# Altium PCB pcb.PCBDOC
Units mm, origin at the board's own origin, x right, y up, seen from the top; angles counter-clockwise.
Board outline 39 x 33 mm, 2 copper layers (TopLayer, BottomLayer), stack 1.671 mm thick; 11 components, 13 nets, 55 pads, 2 vias.
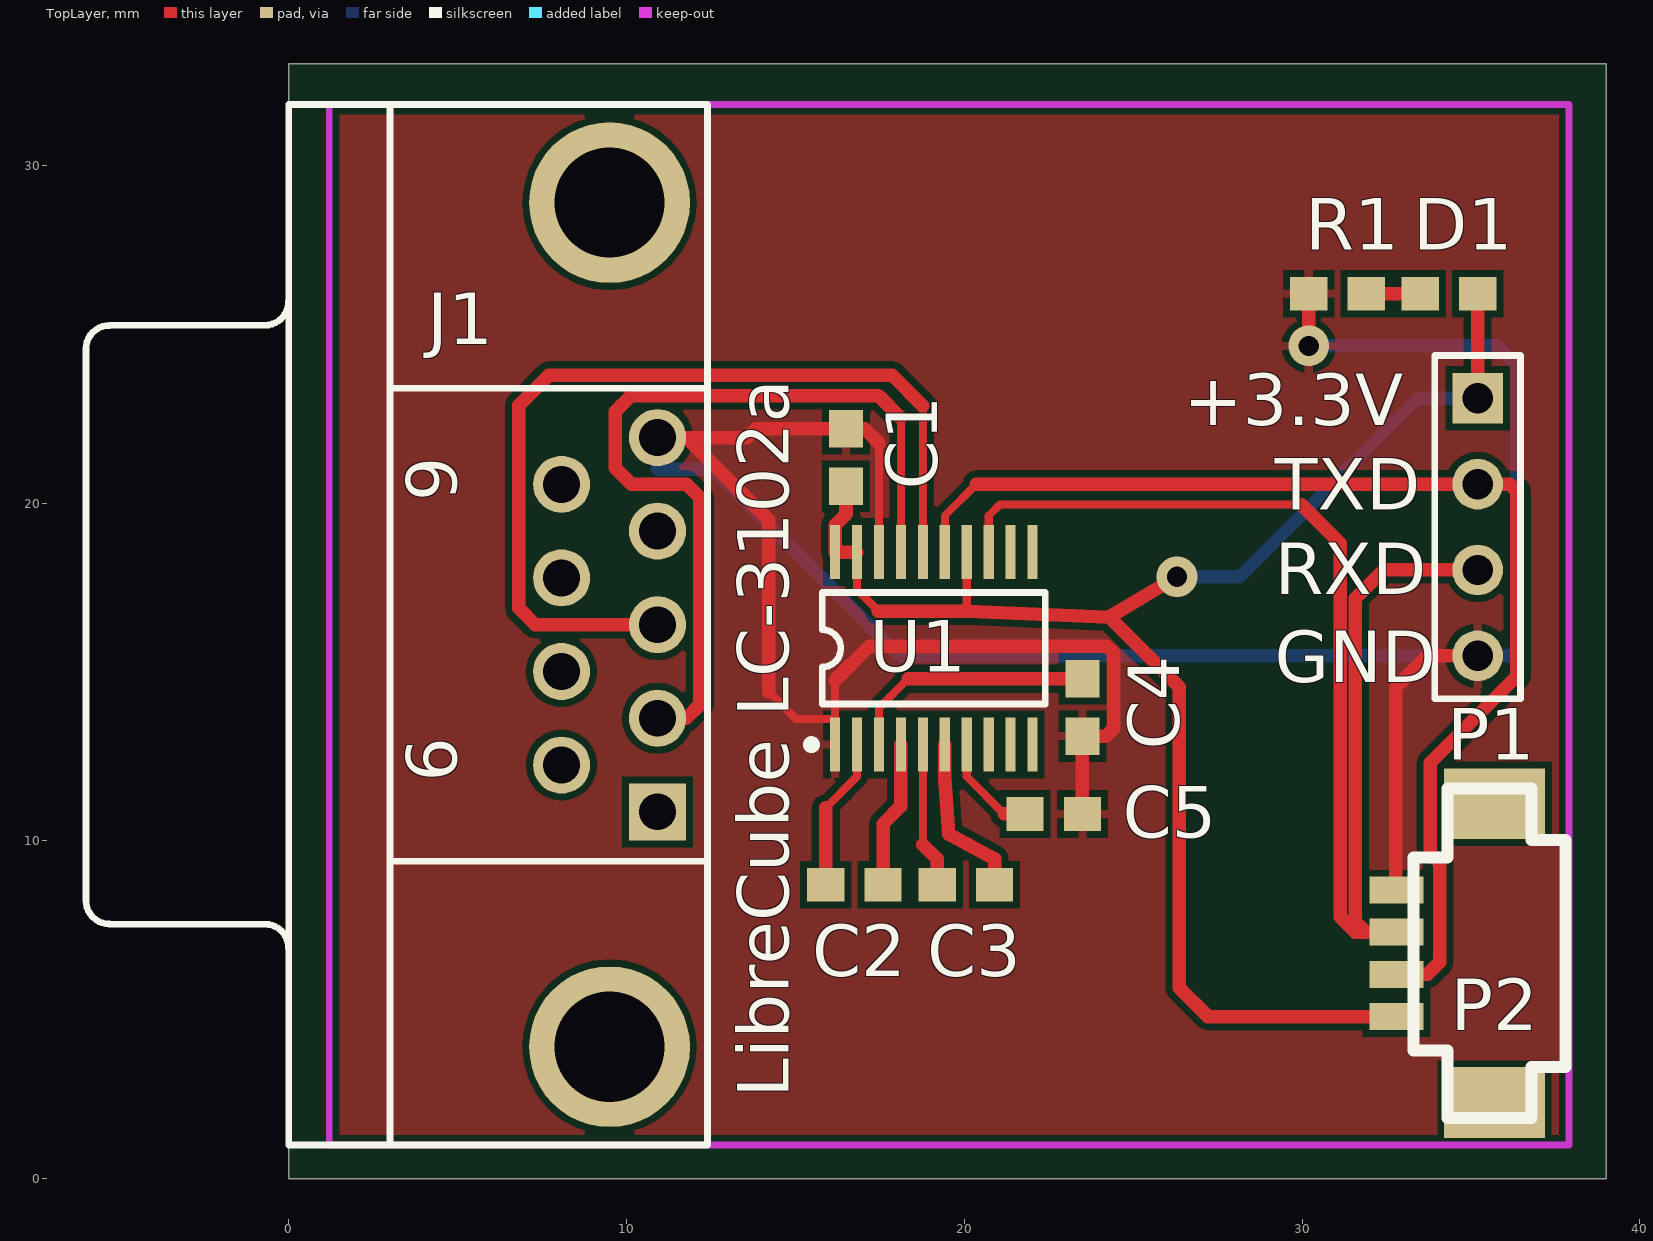
[diagram p0: TopLayer view]
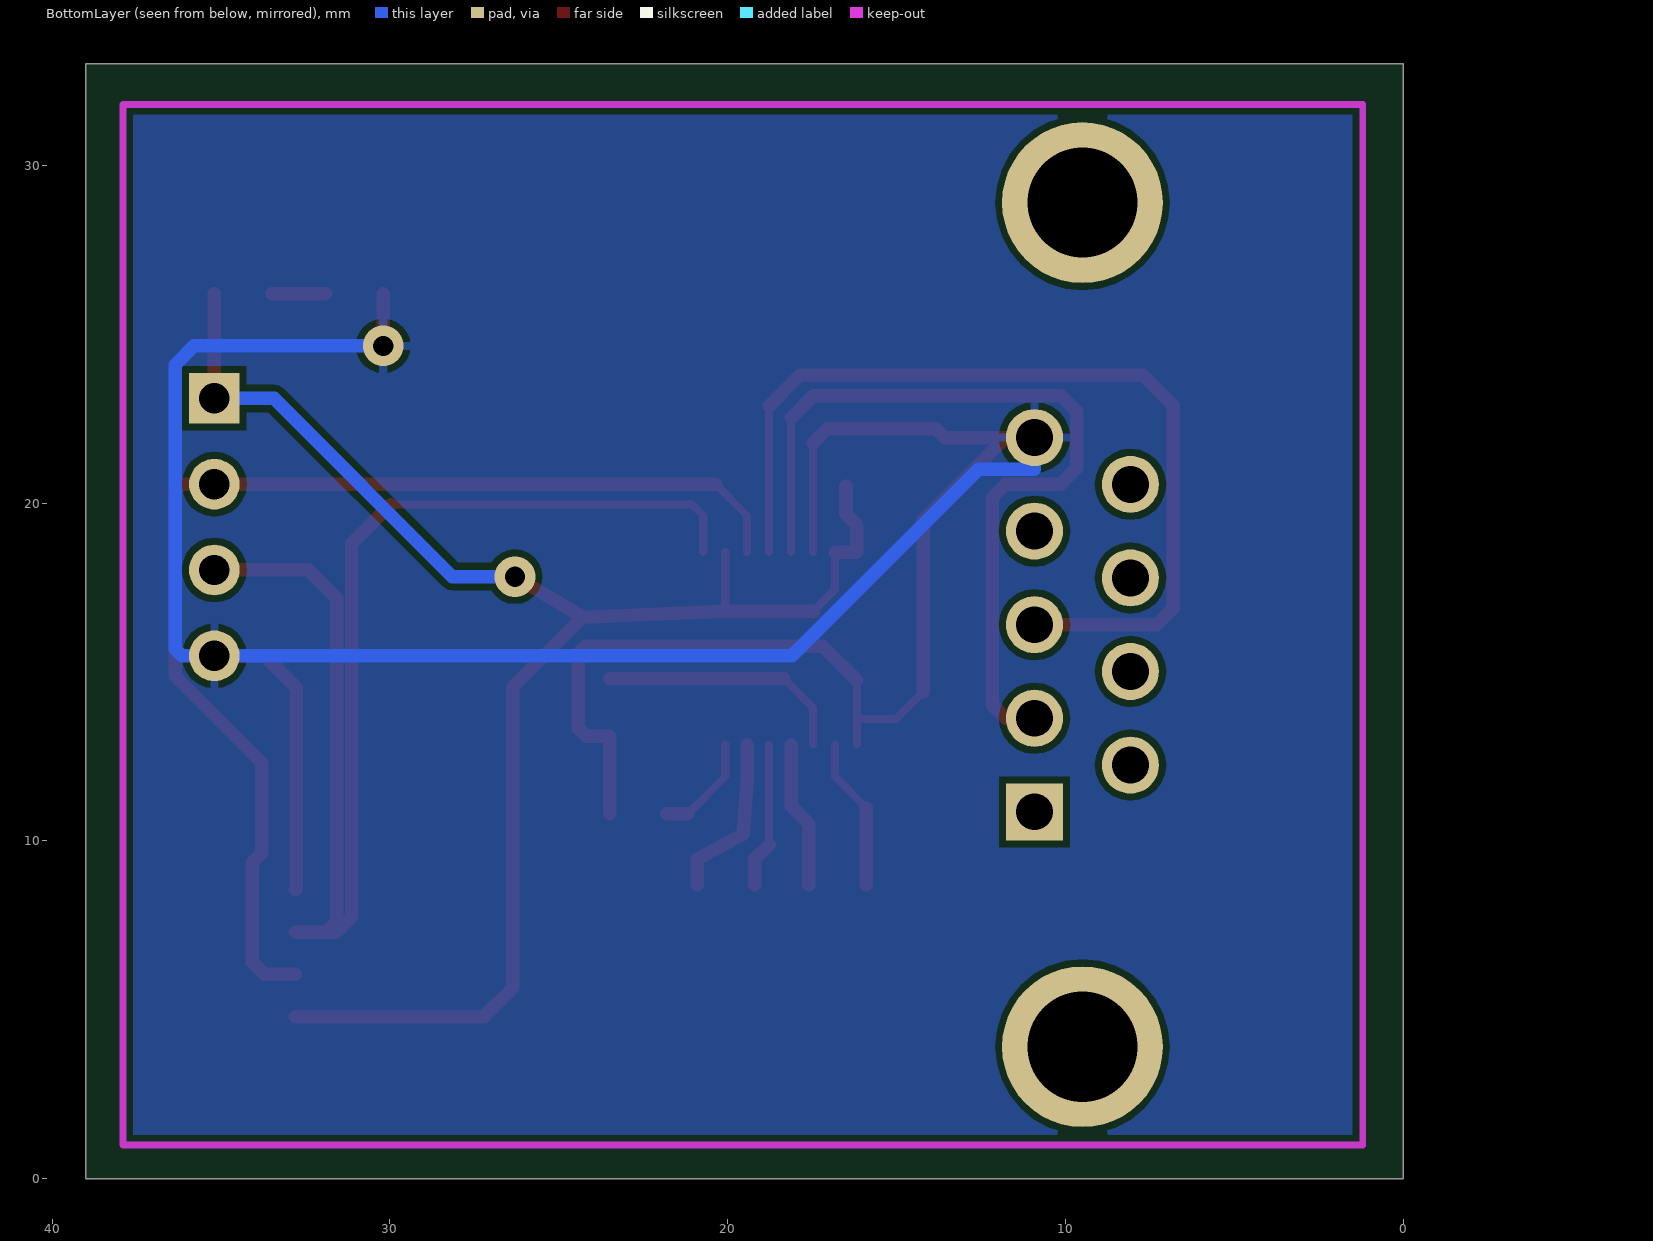
[diagram p1: BottomLayer view, seen from below]

## Layer stack, top to bottom
TopLayer: signal copper 0.0356
Dielectric: core 1.6, FR-4, Dk 4.8
BottomLayer: signal copper 0.0356

## Board outline
0,0 39,0 39,33 0,33

## Design rules (kind name [scope] priority, off if disabled: settings)
Clearance [All] p1: gap=0.2
FabricationTestPointUsage TestPointUsage [All] p1: valid=0 allowmultiple=FALSE
FabricationTestpoint Testpoint [All] p1: side=3 testpointundercomponent=TRUE minsize=1.016 maxsize=2.54 preferedsize=1.524 minholesize=0.508 maxholesize=1.016 preferedholesize=0.813 testpointgrid=0.025 allowsidetop=TRUE allowsidebottom=TRUE usegrid=TRUE gridtolerance=0
PlaneClearance [All] p1: clearance=0
PolygonConnect [All] p1: connectstyle=Relief reliefconductorwidth=0.254 reliefentries=4 polygonreliefangle="90 Angle"
RoutingVias [All] p1: holewidth=0.6 width=1.2 viastyle="Through Hole" minholewidth=0.2 minwidth=0.4 maxholewidth=5 maxwidth=10
SMDNeckDown [All] p1: percent=80.000
SilkscreenOverComponentPads [All] p1: minsilkscreentomaskgap=0.254
SolderMaskExpansion [All] p1: expansion=0.102
Width [All] p1: maxlimit=10 minlimit=0.2 preferedwidth=0.4
24 further rules are at their usual default settings.

## Components (designator, comment, footprint, x,y, rotation, side; value= is the part's Value field where it differs from the comment)
C1 "0.1 uF" 0603 16.5,22.2 r270 top
C2 "0.1 uF" 0603 15.9,8.7 r0 top
C3 "0.1 uF" 0603 20.9,8.7 r180 top
C4 "0.1 uF" 0603 23.5,14.8 r270 top
C5 "0.1 uF" 0603 23.5,10.8 r180 top
D1 "LED" 0603 35.2,26.2 r180 top
J1 "D Connector 9" DSUB1.385-2H9 0,16.4 r90 top
P1 "Header 4" HDR1X4 35.2,23.1 r270 top
P2 "Header 4" MICRO-04-R-SMT 32.8,4.8 r90 top
R1 "1.5 k" 0603 30.2,26.2 r0 top
U1 "MAX3223" TSSOP-20 19.1,15.7 r0 top

## Footprints (in the part's own frame and the unit in brackets; to place one, negate y for a bottom-side part, rotate by r counter-clockwise, add the part's x,y. Pads: shape width x height; smd on the part's side, far side on the other; paste and mask are expansions set on the pad)
0603 [mm] "Chip Capacitor; Body 1.6 x 0.8 mm (LxW typ)"
  rect 1.1x1 smd: 1(0,0) 2(1.7,0)
DSUB1.385-2H9 [mm] "Connector; D Subminiature; 9 Position; Right Angle; Pitch 1.385 mm"
  rect 1.69x1.69 hole 1.09: 1(-5.54,-10.92)
  round 1.69 hole 1.09: 2(-2.77,-10.92) 3(0,-10.92) 4(2.77,-10.92) 5(5.54,-10.92) 6(-4.155,-8.08) 7(-1.385,-8.08) 8(1.385,-8.08) 9(4.155,-8.08)
  round 4.76 hole 3.26: 10(-12.495,-9.5) 11(12.495,-9.5)
  silkscreen extent -15.4,-12.4 15.4,6
HDR1X4 [mm] "Connector; Header; 4 Position"
  rect 1.5x1.5 hole 0.9: 1(0,0)
  round 1.5 hole 0.9: 2(2.54,0) 3(5.08,0) 4(7.62,0)
  silkscreen extent -1.27,-1.27 8.89,1.27
MICRO-04-R-SMT [mm] "Micro Connector Rectangular"
  rect 0.8x1.6 smd: 1(0,0) 2(1.25,0) 3(2.5,0) 4(3.75,0)
  rect 2.1x3 smd: ""(-2.55,-2.9) ""(6.3,-2.9)
  silkscreen extent -3,-5 6.75,-0.5
TSSOP-20 [mm] "Shrink Small Outline; 20 Leads; Body Width 4.4 mm; Pitch 0.65 mm"
  rect 0.3x1.6 smd: 1(-2.925,-2.85) 2(-2.275,-2.85) 3(-1.625,-2.85) 4(-0.975,-2.85) 5(-0.325,-2.85) 6(0.325,-2.85) 7(0.975,-2.85) 8(1.625,-2.85) 9(2.275,-2.85) 10(2.925,-2.85) 11(2.925,2.85) 12(2.275,2.85) 13(1.625,2.85) 14(0.975,2.85) 15(0.325,2.85) 16(-0.325,2.85) 17(-0.975,2.85) 18(-1.625,2.85) 19(-2.275,2.85) 20(-2.925,2.85)
  silkscreen extent -3.75,-2.97 3.3,1.65

## Part data
C1 C2 C3 C4 C5: library part Capacitor, "Capacitor"
D1: "Typical INFRARED GaAs LED"
J1: "Receptacle Assembly, 9 Position, Right Angle"
P1 P2: "Header, 4-Pin"
R1: library part Resistor, "Resistor"

## Via types
v1: diameter 1.2, hole 0.6, TopLayer to BottomLayer, 2 vias

## Nets (pads, with @x,y where several pads share a name; then routed paths per layer and width w, separated by ;. In a path a pad name is that pad's centre, name@x,y a point inside that pad or via, vN(x,y) a via of type N, cw(c..) or ccw(c..) an arc to the next point about the centre after c; other vN are vias at no path point)
+3.3V: C1.2 D1.1 P1.1 P2.1 U1.14 U1.19 U1.20 | length 48.5
  TopLayer w0.24: U1.19 16.825,17.44 17.46,16.805 ; 20.075,16.805 U1.14
  TopLayer w0.4: C1.2 16.5,19.67 16.175,19.345 U1.20 U1.19 ; 17.46,16.805 20.075,16.805 24.293,16.628 ; v1(26.299,17.821) 24.293,16.628 ; P2.1 27.214,4.8 26.367,5.647 26.367,14.554 24.293,16.628 ; 35.2,24.629 D1.1 ; P1.1 35.2,24.629
  BottomLayer w0.4: v1(26.299,17.821) 28.153,17.821 33.432,23.1 P1.1
GND: C1.1 C4.2 C5.1 J1.5 P1.4 P2.4 R1.1 U1.1 U1.18 | length 92.6
  TopLayer w0.24: 14.209,14.418 15.022,13.605 U1.1@16.175,13.605 ; 16.175,14.748 U1.1@16.175,13.605 ; U1.18 17.475,21.779 ; U1.1@16.175,13.605 U1.1 U1.1@16.175,13.605
  TopLayer w0.4: 14.209,14.418 14.209,19.502 11.77,21.94 ; 16.175,14.748 17.191,15.764 24.216,15.764 24.42,15.561 24.42,13.326 24.194,13.1 C4.2 C5.1 ; 17.475,21.779 17.054,22.2 C1.1 13.834,22.2 13.574,21.94 11.77,21.94 ; v1(30.2,24.654) R1.1 ; P2.4 32.776,8.55 32.776,14.54 33.716,15.48 P1.4 ; 11.77,21.94 J1.5 11.77,21.94
  BottomLayer w0.4: J1.5 10.92,20.996 12.583,20.996 18.1,15.48 P1.4 36.154,15.48 36.358,15.683 36.358,24.095 35.799,24.654 v1(30.2,24.654)
NetC2_1: C2.1 U1.2 | length 4.5
  TopLayer w0.24: 15.9,10.978 16.825,11.903 U1.2
  TopLayer w0.4: C2.1 15.9,10.978
NetC2_2: C2.2 U1.4 | length 4.4
  TopLayer w0.4: C2.2 17.6,10.506 18.125,11.031 U1.4
NetC3_1: C3.1 U1.6 | length 5
  TopLayer w0.4: U1.6 19.425,11.852 19.543,10.201 20.102,9.897 20.9,9.465 C3.1
NetC3_2: C3.2 U1.5 | length 4.3
  TopLayer w0.24: 18.775,9.89 U1.5
  TopLayer w0.4: 18.775,9.89 19.2,9.465 C3.2
NetC4_1: C4.1 U1.3 | length 7.5
  TopLayer w0.24: U1.3 17.475,13.935 18.34,14.8
  TopLayer w0.4: 18.34,14.8 C4.1
NetC5_2: C5.2 U1.7 | length 3.1
  TopLayer w0.24: U1.7 20.075,11.903 21.178,10.8
  TopLayer w0.4: 21.178,10.8 C5.2
NetD1_2: D1.2 R1.2 | length 1.6
  TopLayer w0.4: R1.2 32.675,26.2 D1.2
RXD: P1.3 P2.3 U1.13 | length 39.9
  TopLayer w0.24: U1.13 20.725,19.625 21.055,19.955 29.982,19.955
  TopLayer w0.4: 29.982,19.955 31.125,18.812 31.125,7.757 31.582,7.3 31.887,7.3 ; P1.3 32.416,18.02 31.582,17.186 31.582,7.605 31.887,7.3 ; 31.887,7.3 P2.3 31.887,7.3
RXD_TTL: J1.2 U1.17 | length 25
  TopLayer w0.24: U1.17 18.125,22.52
  TopLayer w0.4: J1.2 11.77,13.63 12.177,14.036 12.177,20.158 11.77,20.565 10.145,20.565 9.662,21.047 9.662,22.702 10.145,23.185 17.46,23.185 18.125,22.52
TXD: P1.2 P2.2 U1.15 | length 35
  TopLayer w0.24: U1.15 19.425,19.625 20.36,20.56
  TopLayer w0.4: 20.36,20.56 P1.2 36.154,20.56 36.358,20.357 36.358,14.875 33.792,12.31 33.792,9.643 34.072,9.363 34.072,6.406 33.716,6.05 P2.2
TXD_TTL: J1.3 U1.16 | length 27.3
  TopLayer w0.24: U1.16 18.775,22.876
  TopLayer w0.4: J1.3 7.3,16.4 6.817,16.883 6.817,22.896 7.706,23.785 17.866,23.785 18.775,22.876
pads on no net: J1.1 J1.4 J1.6 J1.7 J1.8 J1.9 J1.10 J1.11 P2. U1.8 U1.9 U1.10 U1.11 U1.12

## Polygon pours and split planes (outlines as drawn)
GND on TopLayer "TopLayer-No Net" (solid, remove dead copper, pour order 1000): -0.073,-0.027 38.927,-0.027 38.827,0.073 38.827,32.973 -0.073,32.973
GND on BottomLayer "TopLayer-No Net" (solid, remove dead copper, pour order 1001): 0.244,-0.006 39.244,-0.006 39.144,0.094 39.144,32.994 0.244,32.994

## Keep-outs
KeepOutLayer:
  lines w0.2: 1.2,1 1.2,31.8 37.9,31.8 37.9,1 1.2,1

## Silkscreen, mask and mechanical layers (free items; w line width, h text height)
TopOverlay:
  text "+3.3V" at 26.5,22.3 h1.52
  text "TXD" at 29.2,19.8 h1.52
  text "RXD" at 29.2,17.3 h1.52
  text "GND" at 29.2,14.7 h1.52
  text "LibreCube LC-3102a" at 14.8,2.4 h1.52 r90
Mechanical1:
  the board outline again, w0.203

## Text inside footprints (layer, text, board x,y; h text height)
J1: TopOverlay "9" at 4.975,20.055 h1.5 r90; TopOverlay "6" at 4.975,11.745 h1.5 r90